# Altium PCB Letest_Combined_array_of DOUBLE_L.PcbDoc
Units mm, origin at the board's own origin, x right, y up, seen from the top; angles counter-clockwise.
Board outline 116 x 91.03 mm, 2 copper layers (Top Layer, Bottom Layer); 14 components, 20 nets, 106 pads, 8 vias.
Unrouted connection lines stored in the file: 1.
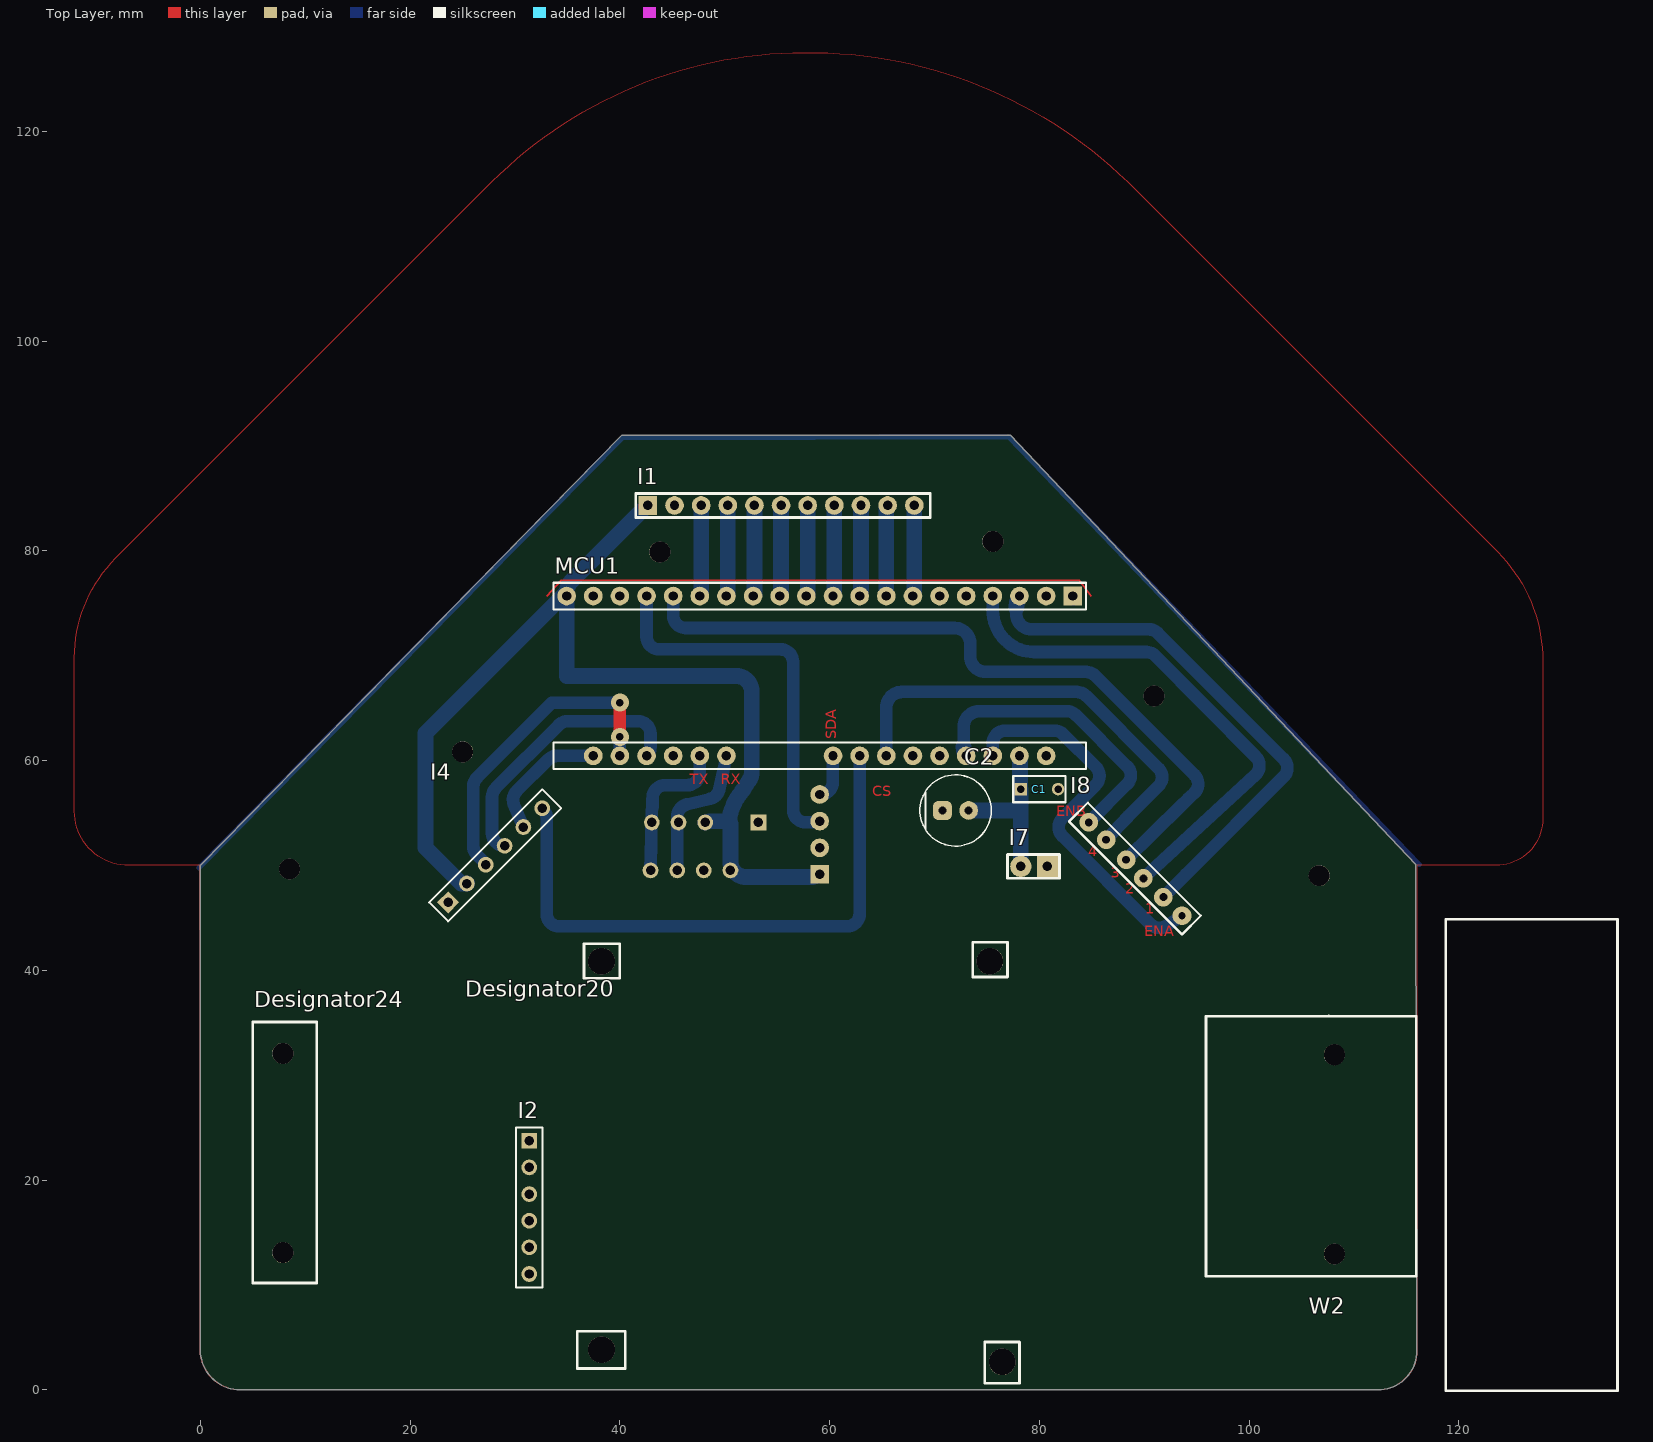
[diagram p0: Top Layer view]
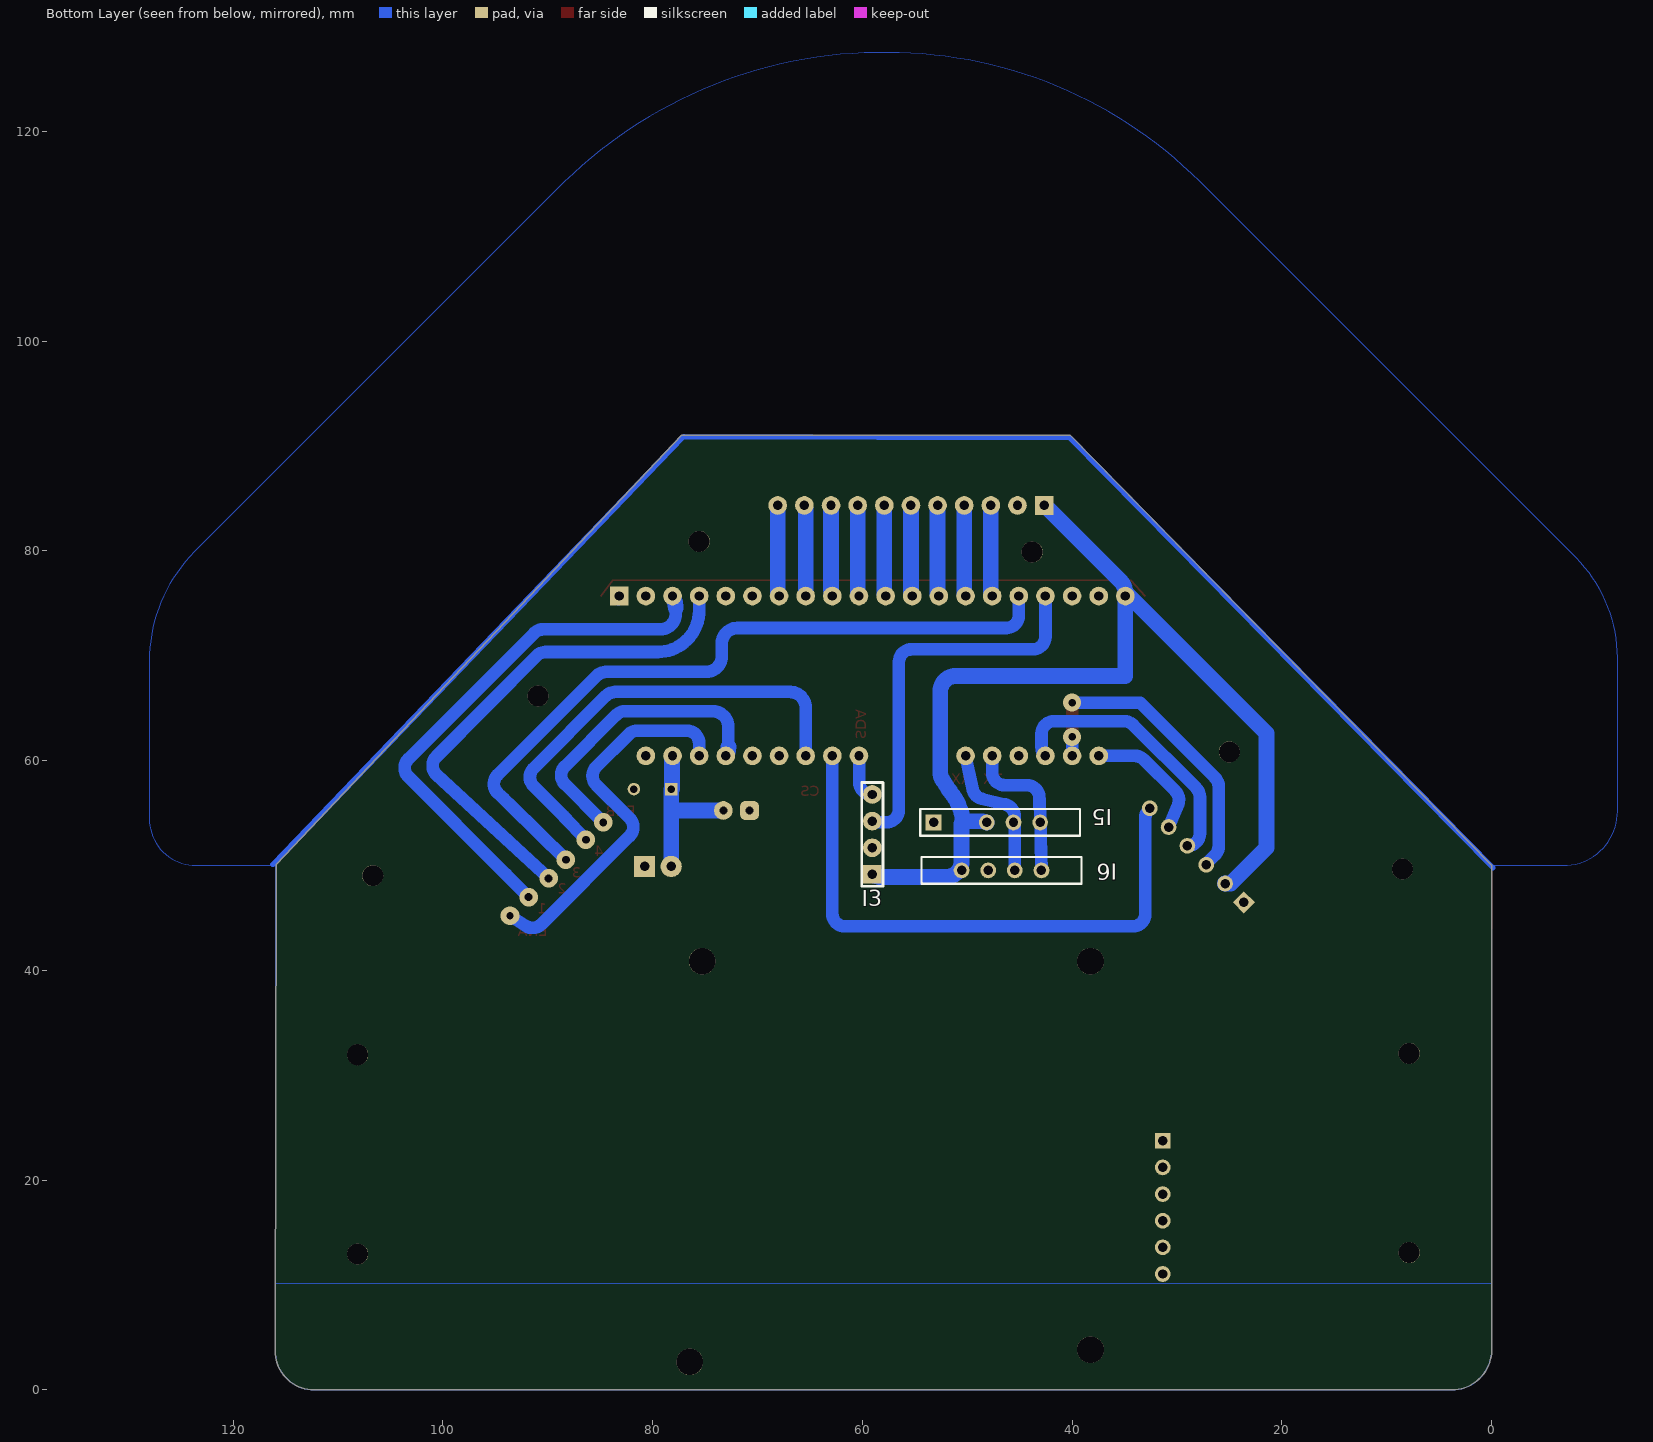
[diagram p1: Bottom Layer view, seen from below]

## Layer stack, top to bottom
Top Solder: solder mask 0.0102, Solder Resist, Dk 3.5
Top Layer: signal copper 0.0356
Dielectric 1: dielectric 0.32, FR-4, Dk 4.8
Bottom Layer: signal copper 0.0356
Bottom Solder: solder mask 0.0102, Solder Resist, Dk 3.5

## Board outline
0,3.81 0,50 40.195,91.032 77.216,91.032 115.896,50.104 116,3.732 cw(c112.269,3.731) 112.268,0 3.81,0 cw(c3.81,3.81)

## Design rules (kind name [scope] priority, off if disabled: settings)
Clearance [All] p1: gap=0.254 ignorepadtopadclearanceinfootprint=FALSE
PolygonConnect [All] p1: connectstyle=Relief reliefconductorwidth=0.254 reliefentries=4 polygonreliefangle="90 Angle" airgapwidth=0.254
RoutingVias [All] p1: holewidth=0.711 width=1.27 viastyle="Through Hole" minholewidth=0.711 minwidth=1.27 maxholewidth=0.711 maxwidth=1.27
SolderMaskExpansion [All] p1: expansion=0.102 istentingtop=FALSE
SupplyNets "Schematic Supply Nets_1" [InNet('GND')] p1: voltage=0.000
SupplyNets "Schematic Supply Nets" [InNet('+5')] p2: voltage=0.000
Width [All] p1: maxlimit=5 minlimit=0.1 preferedwidth=1.2 minimp=50.000000 maximp=50.000000 favimp=50.000000
30 further rules are at their usual default settings.

## Classes and differential pairs
component class MCU: I2 I3 I7 MCU1
component class IR_array: C1 C2 I1

## Components (designator, comment, footprint, x,y, rotation, side; value= is the part's Value field where it differs from the comment)
C1 "0.1uF" FP-RDE0P1-MFG 80.01,57.277 r0 top
C2 "ECEA1CKA101I" FP-RAD-TH-D_6_3_0_5-L_7_1-MFG 72.009,55.245 r0 top
Designator20 "Comment" PCBComponent_1#1 56.769,22.352 r0 top
Designator24 "Comment" PCBComponent_1#2 3.861,34.061 r270 top locked
I1 "MHP1x11" MHP_1x11_ 42.672,84.328 r0 top locked
I2 "SD_Mod" HPC_1x6#1 31.369,23.749 r270 top
I3 "I2S" HPC_1x4 59.055,49.149 r90 bottom
I4 "M_Driver" HPC_1x6#1 23.622,46.482 r45 top locked
I5 "HC_05" HPC_1x6#2 53.213,54.102 r180 bottom
I6 "HC_05" HPC_1x6#3 53.086,49.53 r180 bottom (schematic designator I5)
I7 "" PCBComponent_1#3 80.772,49.911 r180 top
I8 "FTDI" HPC_1x6#4 93.599,45.212 r135 top locked (schematic designator I6)
MCU1 "STM32F411CE" STM32F411CE 83.185,75.692 r90 top locked
W2 "Comment" N20 112.139,10.846 r90 top locked

## Footprints (in the part's own frame and the unit in brackets; to place one, negate y for a bottom-side part, rotate by r counter-clockwise, add the part's x,y. Pads: shape width x height; smd on the part's side, far side on the other; paste and mask are expansions set on the pad)
FP-RAD-TH-D_6_3_0_5-L_7_1-MFG [mil]
  rrect50% 70x70 hole 30 paste-99999 mask+0: 1(-49.21,0)
  round 70 hole 30 paste-99999 mask+0: 2(49.21,0)
  silkscreen extent -134,-134 134,134, body extent -124,-124 124,124, height 315
FP-RDE0P1-MFG [mm]
  rect 1.2x1.2 hole 0.7 paste-2539.97 mask+0: 1(-1.778,0)
  round 1.2 hole 0.7 paste-2539.97 mask+0: 2(1.778,0)
  silkscreen extent -2.5,-1.25 2.5,1.25, body extent -2.5,-1.25 2.5,1.25, height 6
HPC_1x4 [mil]
  rect 70x70 hole 35.43: 1(0,0)
  round 70 hole 35.43: 2(100,0) 3(200,0) 4(300,0)
  silkscreen extent -45,-40 345,40
HPC_1x6#1 [mm]
  rect 1.5x1.5 hole 0.9: 1(0,0)
  round 1.5 hole 0.9: 2(2.54,0) 3(5.08,0) 4(7.62,0) 5(10.16,0) 6(12.7,0)
  silkscreen extent -1.27,-1.27 13.97,1.27
HPC_1x6#2 [mm]
  rect 1.5x1.5 hole 0.9: 1(0,0)
  round 1.5 on Mech1: 2(2.54,0) 6(12.7,0)
  round 1.5 hole 0.9: 3(5.08,0) 4(7.62,0) 5(10.16,0)
  silkscreen extent -1.27,-1.27 13.97,1.27
HPC_1x6#3 [mm]
  rect 1.5x1.5 on Mech1: 1(0,0)
  round 1.5 hole 0.9: 2(2.54,0) 3(5.08,0) 4(7.62,0) 5(10.16,0)
  round 1.5 on Mech1: 6(12.7,0)
  silkscreen extent -1.27,-1.27 13.97,1.27
HPC_1x6#4 [mm]
  rect 1.5x1.5 on Mech1: 1(0,0)
  round 1.5 on Mech1: 2(2.54,0) 3(5.08,0) 4(7.62,0) 5(10.16,0) 6(12.7,0)
  silkscreen extent -1.27,-1.27 13.97,1.27
MHP_1x11_ [mil]
  rect 70x70 hole 35.43 mask+4: 1(0,0)
  round 70 hole 35.43 mask+4: 2(100,0) 3(200,0) 4(300,0) 5(400,0) 6(500,0) 7(600,0) 8(700,0) 9(800,0) 10(900,0) 11(1000,0)
  silkscreen extent -45,-45 1060,45
N20 [mil]
  round 79 hole 79: 16(83,158) 17(831,158)
  silkscreen extent -430,-905 1340,640
PCBComponent_1#1 [mil]
  round 100 hole 100: 21(-729,-729) 22(-729,729) 23(729,729) 24(775,-775) ""(775,-775)
  silkscreen extent -820,-855 840,800
PCBComponent_1#2 [mil]
  round 79 hole 79: 16(78,158) 17(826,158)
  silkscreen extent -40,45 940,285
PCBComponent_1#3 [mil]
  rect 80x80 hole 35.43: 1(0,0)
  round 80 hole 35.43: 2(100,0)
  silkscreen extent -45,-45 150,45
STM32F411CE [mil]
  rect 70x70 hole 35.43 mask+4: 1(0,0)
  round 70 hole 35.43 mask+4: 2(0,100) 3(0,200) 4(0,300) 5(0,400) 6(0,500) 7(0,600) 8(0,700) 9(0,800) 10(0,900) 11(0,1000) 12(0,1100) 13(0,1200) 14(0,1300) 15(0,1400) 16(0,1500) 17(0,1600) 18(0,1700) 19(0,1800) 20(0,1900) 22(-600,100) 23(-600,200) 24(-600,300) 25(-600,400) 26(-600,500) 27(-600,600) 28(-600,700) 29(-600,800) 30(-600,900) 34(-600,1300) 35(-600,1400) 36(-600,1500) 37(-600,1600) 38(-600,1700) 39(-600,1800)
  round 70 on Mech1 mask+4: 21(-600,0) 31(-600,1000) 32(-600,1100) 33(-600,1200) 40(-600,1900)
  silkscreen extent -650,-50 50,1950

## Part data
C1: library part CMP-06035-046728-1, "Ceramic Capacitor 100nF ±10% 25V X7R Radial", Capacitance=100nF, Case/Package=Radial, Dielectric=X7R, Max Operating Temperature=125°C, Min Operating Temperature=-55°C, Package Quantity=2000, Resistor Type=Ceramic, Tolerance=10%, Voltage Rating=25V, Height=3.5mm, Height - Seated (Max)=0.236inch, Lead Diameter=0.5mm, Lead Free="Lead Free", Lead Pitch=0.098inch, Length=0.197inch, Mount="Through Hole", Packaging="Tape and Reel", Termination=Radial, Voltage Rating (DC)=25V, Width=3.5mm
C2: library part CMP-05427-001316-1, "Aluminum Electrolytic Capacitors (Radial Lead Type) 100uF ±20% 16V", Capacitance=100uF, Case/Package=Radial, Max Operating Temperature=85°C, Min Operating Temperature=-40°C, Package Quantity=2000, Ripple Current=91mA, Tolerance=20%, Voltage=16V, Diameter=6.3mm, Height=7mm, Height - Seated (Max)=0.315inch, Lead Diameter=0.45mm, Lead Pitch=2.5mm, Length=7mm, Life (Hours)=1000Hour, Mount="Through Hole", Packaging="Tape and Reel", Polarity=Polar, Radiation Hardening=No, RoHS Compliant=Yes, Series=KA, Termination=Radial, Voltage Rating=16V, Voltage Rating (DC)=16V
I7: library part Component_1

## Free pads (board coordinates)
  round 2 hole 2: 2(75.565,80.899) 3(43.815,79.883) 4(106.68,49.022) 6(8.509,49.657) 7(25.019,60.833) 8(90.932,66.167)

## Via types
v1: diameter 1.77, hole 0.75, Top Layer to Bottom Layer, 5 vias
v2: diameter 1.7, hole 0.711, Top Layer to Bottom Layer, 2 vias
v3: diameter 1.77, hole 0.711, Top Layer to Bottom Layer, 1 vias

## Nets (pads, with @x,y where several pads share a name; then routed paths per layer and width w, separated by ;. In a path a pad name is that pad's centre, name@x,y a point inside that pad or via, vN(x,y) a via of type N, cw(c..) or ccw(c..) an arc to the next point about the centre after c; other vN are vias at no path point)
+5: C1.1 C2.2 I1.1 I3.1 I4.2 I5.3 I6.2 I7.2 MCU1.20 MCU1.23 | length 117.3
  Top Layer w1.5: I1.1@42.533,84.189 I1.1 I1.1@42.533,84.255
  Bottom Layer w1.5: I4.2 24.874,48.278 21.463,51.689 21.463,62.611 34.544,75.692 MCU1.20 34.925,76.029 cw(c36.425,76.029) 35.363,77.089 42.232,83.957 cw(c43.29,82.894) 42.533,84.189 I1.1@42.533,84.258 ; MCU1.20@34.925,75.819 34.925,75.094 34.925,68.072 51.078,68.072 cw(c51.078,66.572) 52.578,66.572 52.578,60.794 52.578,60.791 52.578,58.925 cw(c51.078,58.927) 52.327,58.096 51.734,57.205 cw(c49.399,58.758) 51.655,57.093 51.374,56.712 ccw(c55.403,53.737) 50.419,54.229 48.737,54.229 ccw(c48.737,52.729) I5.3 ; 50.546,53.975 50.546,50.395 ccw(c52.046,50.395) 52.046,48.895 58.223,48.895 ccw(c58.22,50.395) 58.534,48.928 58.916,49.01 I3.1 ; C2.2 78.105,55.245 78.232,55.118 ; MCU1.23 78.158,60.399 78.158,57.351 C1.1 78.232,55.118 ; I7.2 78.232,55.118
GND: C1.2 C2.1 I1.2 I3.2 I4.1 I5.1 I6.3 I7.1 MCU1.19 MCU1.22
IR_01: I1.3 MCU1.15 | length 8.7
  Bottom Layer w1.5: MCU1.15 ccw(c46.252,76.296) 47.752,76.296 I1.3
IR_02: I1.4 MCU1.14 | length 8.7
  Top Layer w1.5: MCU1.14 MCU1.14@50.165,75.767
  Bottom Layer w1.5: MCU1.14@50.165,75.767 50.292,75.894 I1.4
IR_03: I1.5 MCU1.13 | length 8.7
  Top Layer w1.5: MCU1.13 MCU1.13@52.705,75.767
  Bottom Layer w1.5: MCU1.13@52.705,75.767 52.832,75.894 I1.5
IR_04: I1.6 MCU1.12 | length 8.7
  Top Layer w1.5: MCU1.12 MCU1.12@55.245,75.767
  Bottom Layer w1.5: MCU1.12@55.245,75.767 55.372,75.894 I1.6
IR_05: I1.7 MCU1.11 | length 8.7
  Top Layer w1.5: MCU1.11 MCU1.11@57.785,75.767
  Bottom Layer w1.5: MCU1.11@57.785,75.767 57.912,75.894 I1.7
IR_06: I1.8 MCU1.10 | length 8.7
  Bottom Layer w1.5: MCU1.10 ccw(c58.952,76.296) 60.452,76.296 I1.8
IR_07: I1.9 MCU1.9 | length 8.7
  Bottom Layer w1.5: MCU1.9 ccw(c61.492,76.296) 62.992,76.296 I1.9
IR_08: I1.10 MCU1.8 | length 8.7
  Bottom Layer w1.5: MCU1.8 65.405,83.727 cw(c66.905,83.724) I1.10
IR_09: I1.11 MCU1.7 | length 8.7
  Bottom Layer w1.5: MCU1.7 ccw(c66.572,76.296) 68.072,76.296 I1.11
NetRe1_2: 
NetRe2_2: 
NetRe3_2: 
NetRe4_2: 
NetRe5_2: 
NetRe6_2: 
NetRe7_2: 
NetRe8_2: 
NetRe9_2: 
pads on no net: Designator20. Designator20.21 Designator20.22 Designator20.23 Designator20.24 Designator24.16 Designator24.17 I2.1 I2.2 I2.3 I2.4 I2.5 I2.6 I3.3 I3.4 I4.3 I4.4 I4.5 I4.6 I5.2 I5.4 I5.5 I5.6 I6.1 I6.4 I6.5 I6.6 I8.1 I8.2 I8.3 I8.4 I8.5 I8.6 MCU1.1 MCU1.2 MCU1.3 MCU1.4 MCU1.5 MCU1.6 MCU1.16 MCU1.17 MCU1.18 MCU1.21 MCU1.24 MCU1.25 MCU1.26 MCU1.27 MCU1.28 MCU1.29 MCU1.30 MCU1.31 MCU1.32 MCU1.33 MCU1.34 MCU1.35 MCU1.36 MCU1.37 MCU1.38 MCU1.39 MCU1.40 W2.16 W2.17
copper on no net: | length 684.2
  Top Layer w0.127: 0,43.942 0,50 ; 33.02,75.692 34.417,77.216 83.82,77.216 84.963,75.692
  Top Layer w1.2: v2(40.005,62.265) 40.005,62.357 40.005,62.484 v2(40.005,65.532)
  Top Layer w1.5: 65.405,60.377 65.405,60.452 ; 75.512,60.399 75.565,60.452
  Bottom Layer w0.127: 40.173,90.719 cw(c40.263,90.63) 40.263,90.757 ; 77.008,90.884 cw(c77.008,90.757) 77.1,90.845
  Bottom Layer w0.5: -0.127,49.784 9.948,60.018 30.098,80.485 40.173,90.719 ; 40.263,90.757 77.008,90.884 ; 77.1,90.845 116.217,50.09
  Bottom Layer w1.2: 27.214,50.074 ccw(c26.147,49.525) 26.997,50.373 26.386,50.983 cw(c27.235,51.831) 26.035,51.831 26.035,57.542 cw(c27.235,57.542) 26.386,58.39 33.528,65.532 36.97,65.532 37.351,65.532 v2(40.005,65.532) ; 29.01,51.87 29.001,51.87 cw(c29.013,53.07) 27.813,53.07 27.813,56.526 cw(c29.013,56.526) 28.164,57.374 34.193,63.403 cw(c35.041,62.554) 35.041,63.754 41.726,63.754 cw(c41.726,62.554) 42.926,62.554 42.926,61.329 cw(c41.726,61.33) 42.556,60.464 ccw(c43.149,59.848) 42.545,60.452 ; 30.806,53.666 29.979,55.604 cw(c37.572,58.847) 29.897,55.801 cw(c31.014,56.241) 30.165,57.089 33.175,60.099 cw(c34.025,59.252) 34.025,60.452 37.465,60.452 ; 32.602,55.462 32.67,55.395 cw(c31.82,54.547) 33.02,54.547 33.02,45.396 ccw(c34.22,45.396) 34.22,44.196 61.665,44.196 ccw(c61.665,45.396) 62.865,45.396 62.865,60.452 ; 40.005,60.452 40.005,61.812 40.096,61.993 v2(40.005,62.265) ; 42.545,75.692 42.545,71.812 ccw(c43.745,71.812) 43.745,70.612 55.315,70.612 cw(c55.315,69.412) 56.515,69.412 56.515,55.318 ccw(c57.715,55.318) 57.715,54.118 58.554,54.118 ccw(c58.552,55.318) 59.054,54.228 59.055,54.229 ; 42.926,49.53 42.983,52.658 ccw(c41.783,52.68) 42.983,52.68 42.983,53.448 cw(c44.183,53.445) 42.984,53.492 43.053,55.245 ccw(c41.91,55.612) 43.11,55.612 43.11,56.242 cw(c44.31,56.239) 43.113,56.324 43.129,56.543 cw(c44.326,56.458) 44.326,57.658 46.425,57.658 ccw(c46.425,58.858) 47.625,58.858 47.625,60.452 ; 45.085,75.692 45.085,73.844 ccw(c46.285,73.844) 46.285,72.644 71.906,72.644 cw(c71.906,71.144) 73.406,71.144 73.406,69.953 ccw(c74.906,69.953) 74.906,68.453 84.466,68.453 cw(c84.466,67.253) 85.314,68.102 94.787,58.629 cw(c93.94,57.778) 94.766,56.907 94.763,56.905 ccw(c151.89,-3.72) 93.511,55.7 v1(88.265,50.546) ; 45.466,49.53 45.466,51.054 45.466,52.68 45.466,54.102 45.466,54.652 cw(c46.666,54.652) 46.387,55.819 48.587,56.345 ccw(c48.31,57.512) 49.483,57.262 50.164,60.45 ccw(c48.991,60.703) 50.165,60.452 ; 59.055,56.769 ccw(c59.114,57.968) 60.314,57.968 60.314,60.435 ; 65.405,60.452 65.405,65.048 cw(c66.905,65.048) 66.905,66.548 83.577,66.548 cw(c83.577,65.348) 84.425,66.197 91.353,59.269 cw(c90.505,58.42) 91.353,57.571 88.489,54.707 ccw(c89.339,53.86) 88.466,54.684 v1(86.36,52.451) ; 72.771,61.287 72.771,63.201 cw(c74.271,63.201) 74.271,64.701 82.63,64.701 cw(c82.63,63.501) 83.477,64.351 88.37,59.458 cw(c87.52,58.61) 88.369,57.762 v1(84.709,54.102) ; 75.565,60.452 75.565,61.665 cw(c76.765,61.665) 76.765,62.865 81.418,62.865 cw(c81.418,61.665) 82.265,62.515 85.386,59.394 cw(c84.536,58.547) 85.386,57.7 82.192,54.506 ccw(c83.041,53.657) 82.191,52.81 90.606,44.395 ccw(c91.453,45.245) 92.106,44.238 v3(93.599,45.212) ; 75.565,75.692 75.565,74.295 ccw(c79.502,74.295) 79.502,70.358 90.193,70.358 cw(c90.193,69.158) 91.043,70.005 100.634,60.367 cw(c99.784,59.521) 100.598,58.64 v1(89.916,48.768) ; 77.792,74.017 ccw(c79.292,74.017) 79.292,72.517 90.435,72.517 cw(c90.435,71.317) 91.283,72.166 103.291,60.158 cw(c102.443,59.309) 103.291,58.46 93.967,49.136 v1(91.821,46.99) ; 77.812,74.769 77.834,74.901
  Bottom Layer w1.5: 72.771,61.287 ccw(c74.271,61.287) 73.025,60.452 ; 77.792,74.528 cw(c79.292,74.528) 77.812,74.769 ; 77.834,74.901 cw(c79.314,74.656) 77.875,75.082 77.93,75.265 cw(c79.367,74.836) 77.994,75.44 78.105,75.692 ; 83.185,75.692 83.289,75.553

## Polygon pours and split planes (outlines as drawn)
GND on Bottom Layer "NONET_L02_P002" (solid, shelved, pour order 2): 0,10.16 0,50 -6.82,50 cw(c-6.82,55.18) -12,55.18 -12,69.8 cw(c1.461,69.8) -8.057,79.319 27.8,115.176 cw(c57.572,85.404) 57.572,127.508 cw(c58.103,84.124) 88.405,115.176 123.686,79.895 cw(c113.273,69.481) 128,69.481 128,54.467 cw(c123.533,54.467) 123.533,50 116,50 116,10.16
GND on Bottom Layer "B_G_P" (solid, shelved, pour order 1): 0,3.81 0,50 -6.82,50 cw(c-6.82,55.18) -12,55.18 -12,69.8 cw(c1.461,69.8) -8.057,79.319 27.8,115.176 cw(c57.572,85.404) 57.572,127.508 cw(c58.103,84.124) 88.405,115.176 123.686,79.895 cw(c113.273,69.481) 128,69.481 128,54.467 cw(c123.533,54.467) 123.533,50 116,50 116,3.732 cw(c112.268,3.732) 112.268,0 3.81,0 cw(c3.81,3.81)
GND on Top Layer "UP_G_P" (solid, shelved, pour order 0): 0,3.81 0,50 -6.82,50 cw(c-6.82,55.18) -12,55.18 -12,69.8 cw(c1.461,69.8) -8.057,79.319 27.8,115.176 cw(c57.572,85.404) 57.572,127.508 cw(c58.103,84.125) 88.405,115.176 123.686,79.895 cw(c113.273,69.481) 128,69.481 128,54.467 cw(c123.533,54.467) 123.533,50 116,50 116,3.732 cw(c112.268,3.732) 112.268,0 3.81,0 cw(c3.81,3.81)

## Other copper
Top Layer:
  text "SDA" at 60.633,62.049 h1 r90
  text "TX" at 46.682,57.731 h1
  text "RX" at 49.603,57.731 h1
  text "CS" at 64.081,56.588 h1
  text "ENB" at 81.607,54.683 h1
  text "4" at 84.655,50.873 h1
  text "3" at 86.814,48.841 h1
  text "2" at 88.211,47.317 h1
  text "1" at 90.116,45.412 h1
  text "ENA" at 89.989,43.253 h1

## Silkscreen, mask and mechanical layers (free items; w line width, h text height)
Mechanical 1:
  lines w0.127: 0,43.942 32.989,43.741 33.02,75.692 ; 84.963,75.692 85.357,43.289 ; 116.205,43.053 107.484,43.12 ; 116.547,43.194 107.484,43.12 ; 85.357,43.289 85.359,43.064 ccw(c85.486,43.066) 85.487,42.939 107.484,43.12 ; 85.357,43.289 107.484,43.12
Top Assembly:
  text "I7" at 73.66,49.149 h1.52
Top Component Center:
  lines w0.127: 0.127,49.784 0.127,50.546 5.461,50.546